# Altium PCB top_board_rev1.PcbDoc
Units mm, origin at the board's own origin, x right, y up, seen from the top; angles counter-clockwise.
Board outline 109 x 70 mm, 4 copper layers (Top Layer, +12V, -12V, Bottom Layer), stack 0.603 mm thick; 89 components, 70 nets, 332 pads, 60 vias.
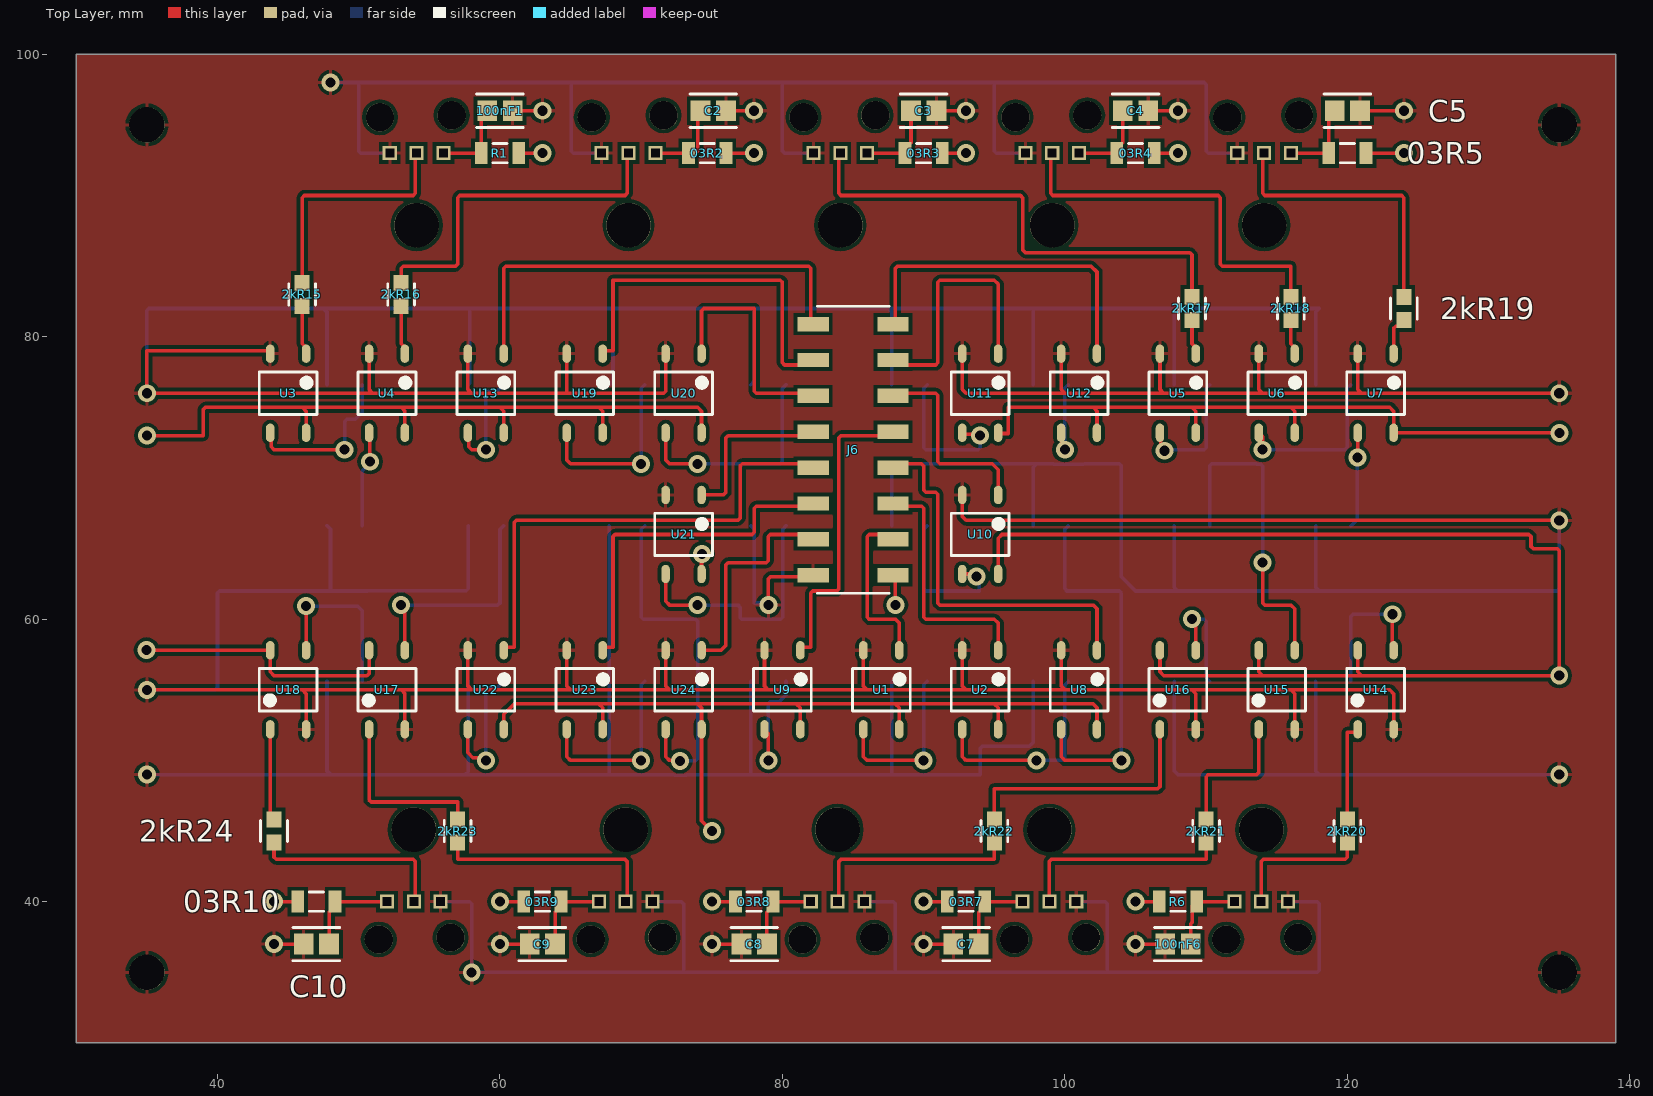
[diagram p0: Top Layer view]
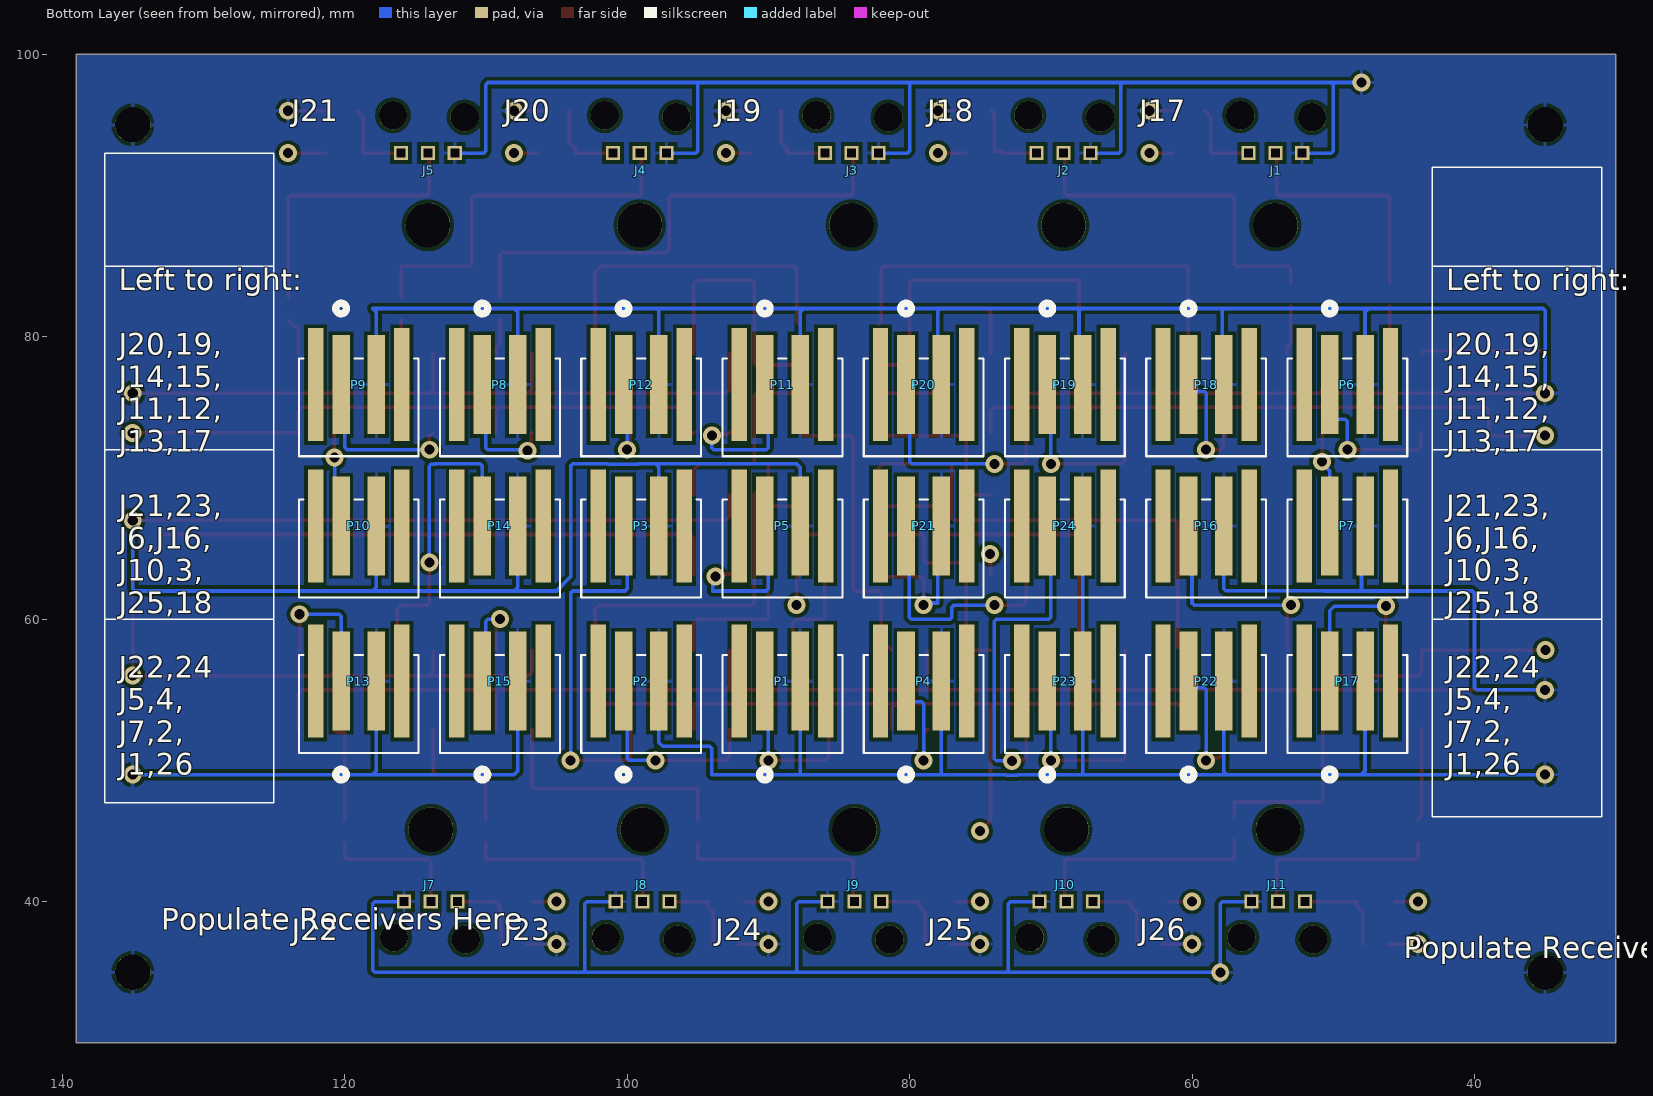
[diagram p1: Bottom Layer view, seen from below]
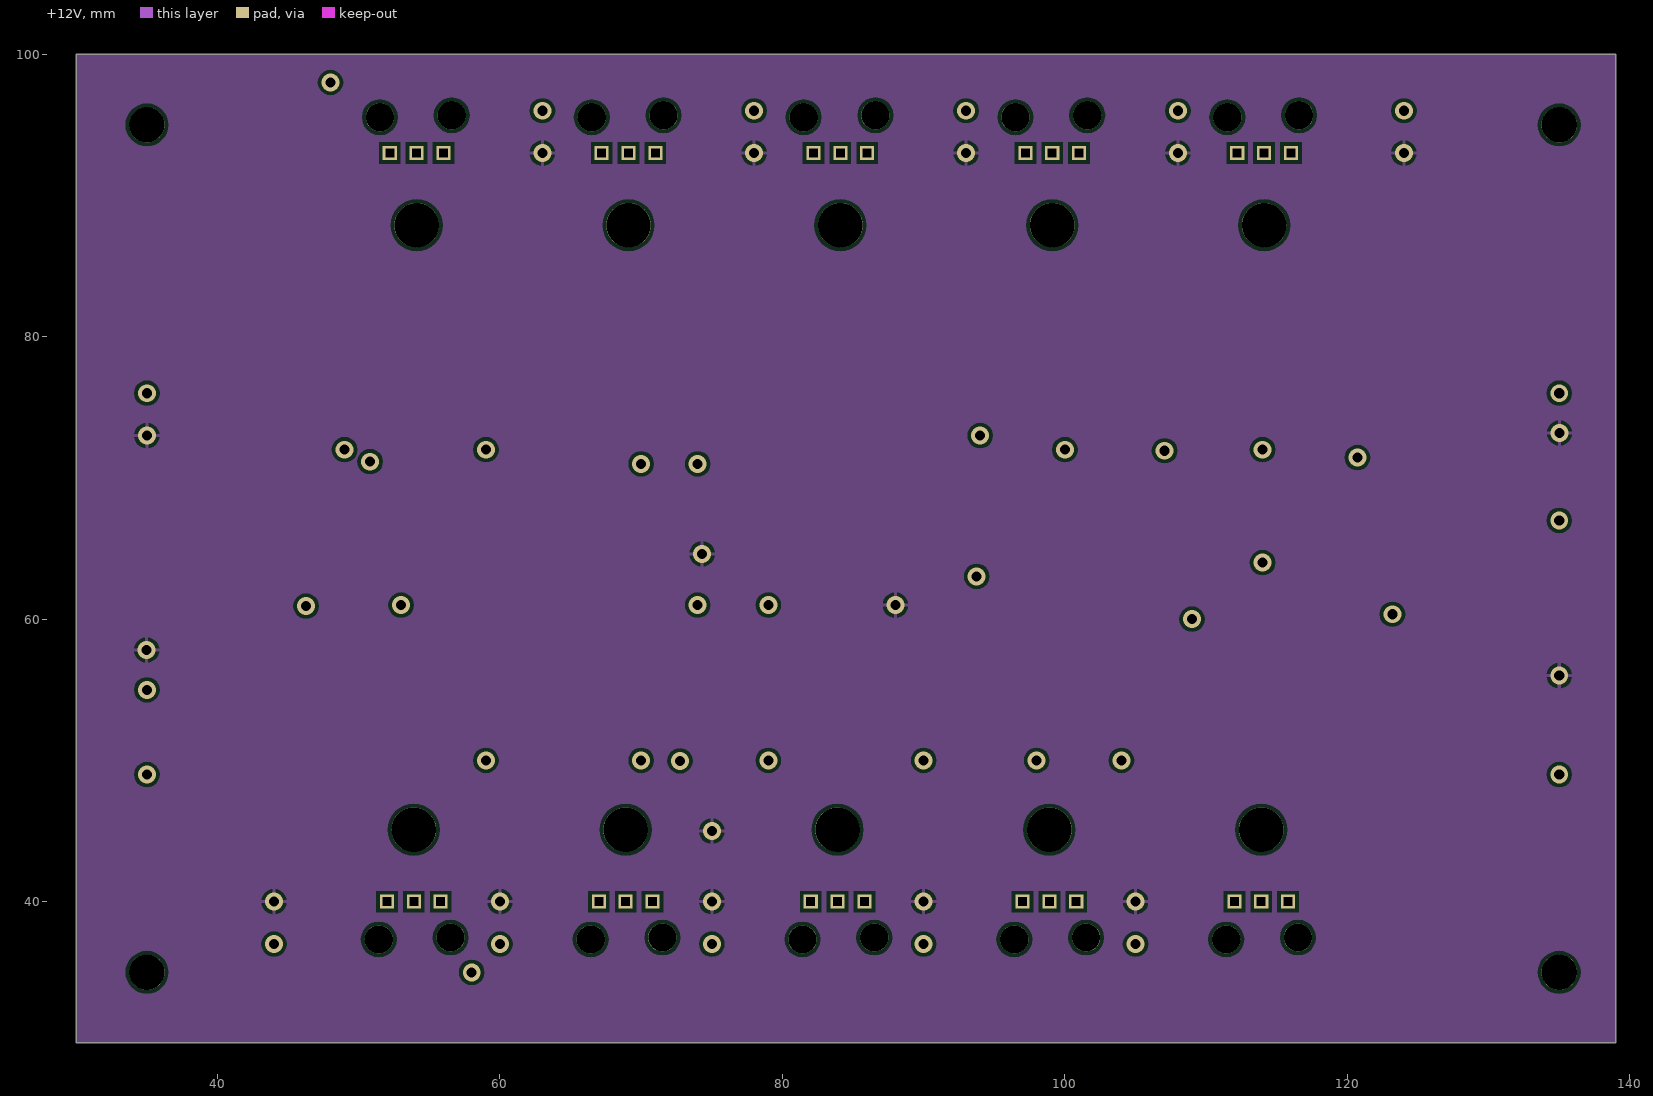
[diagram p2: +12V]
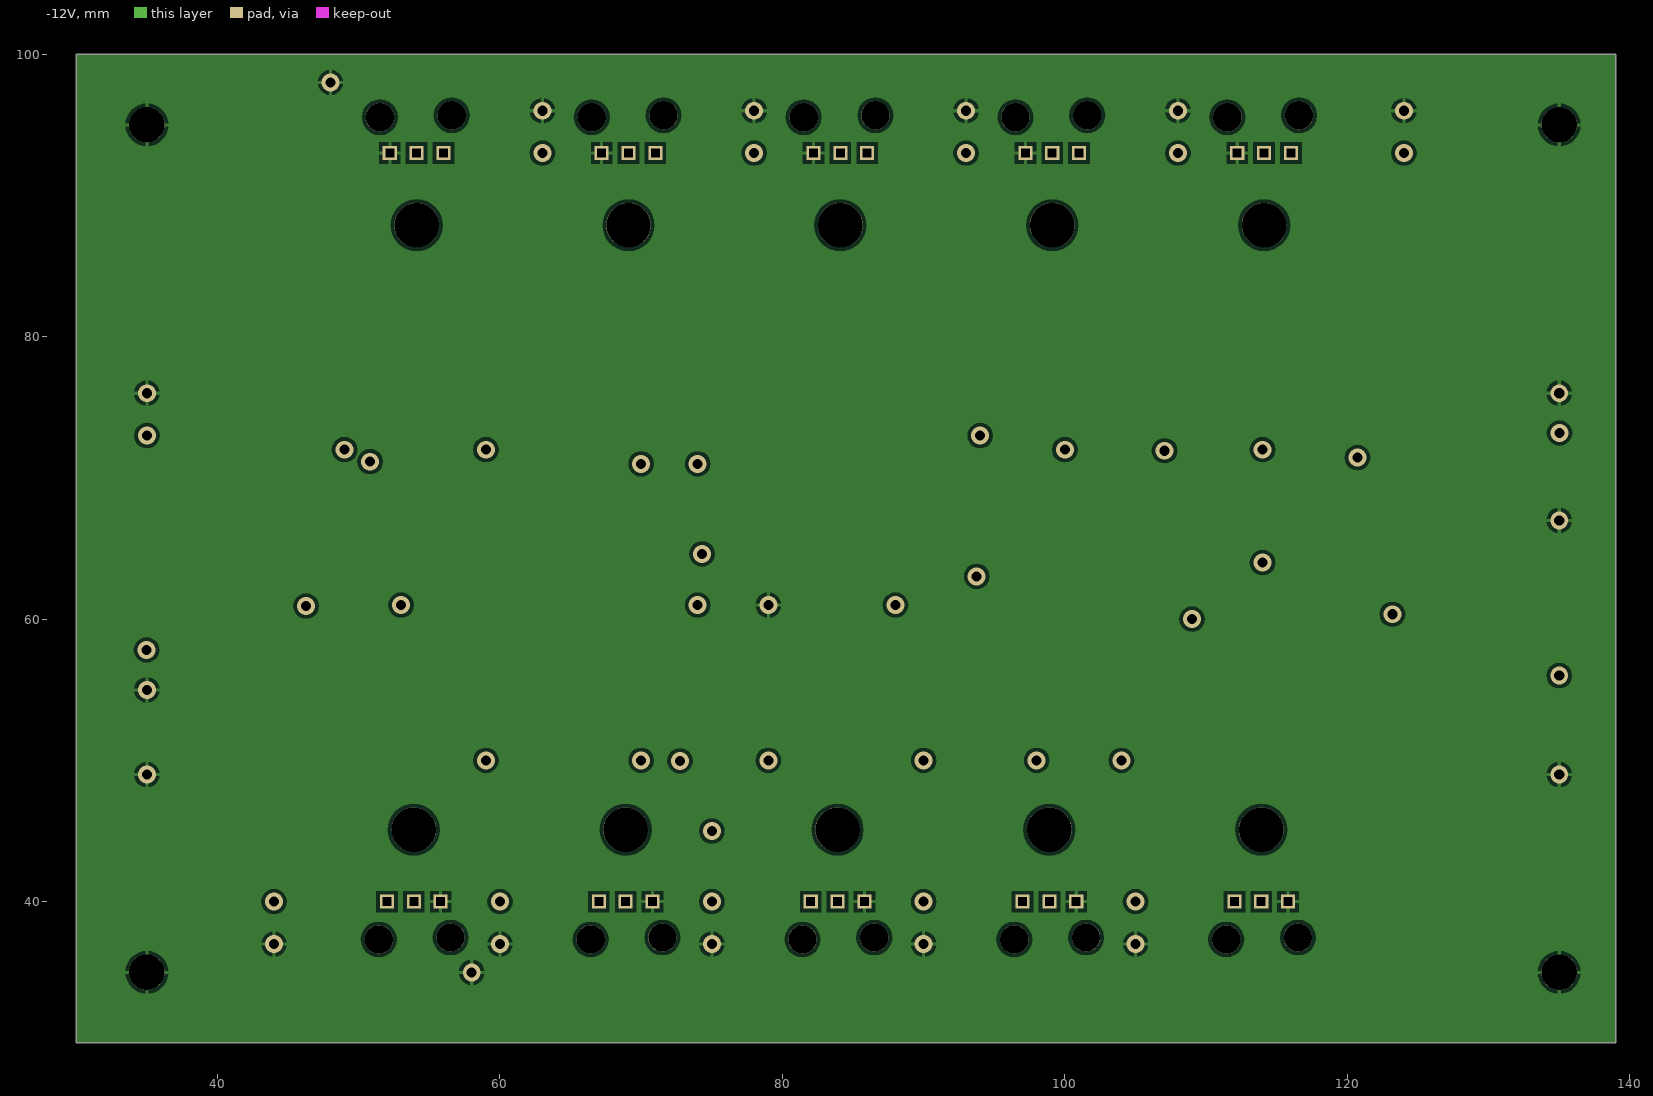
[diagram p3: -12V]
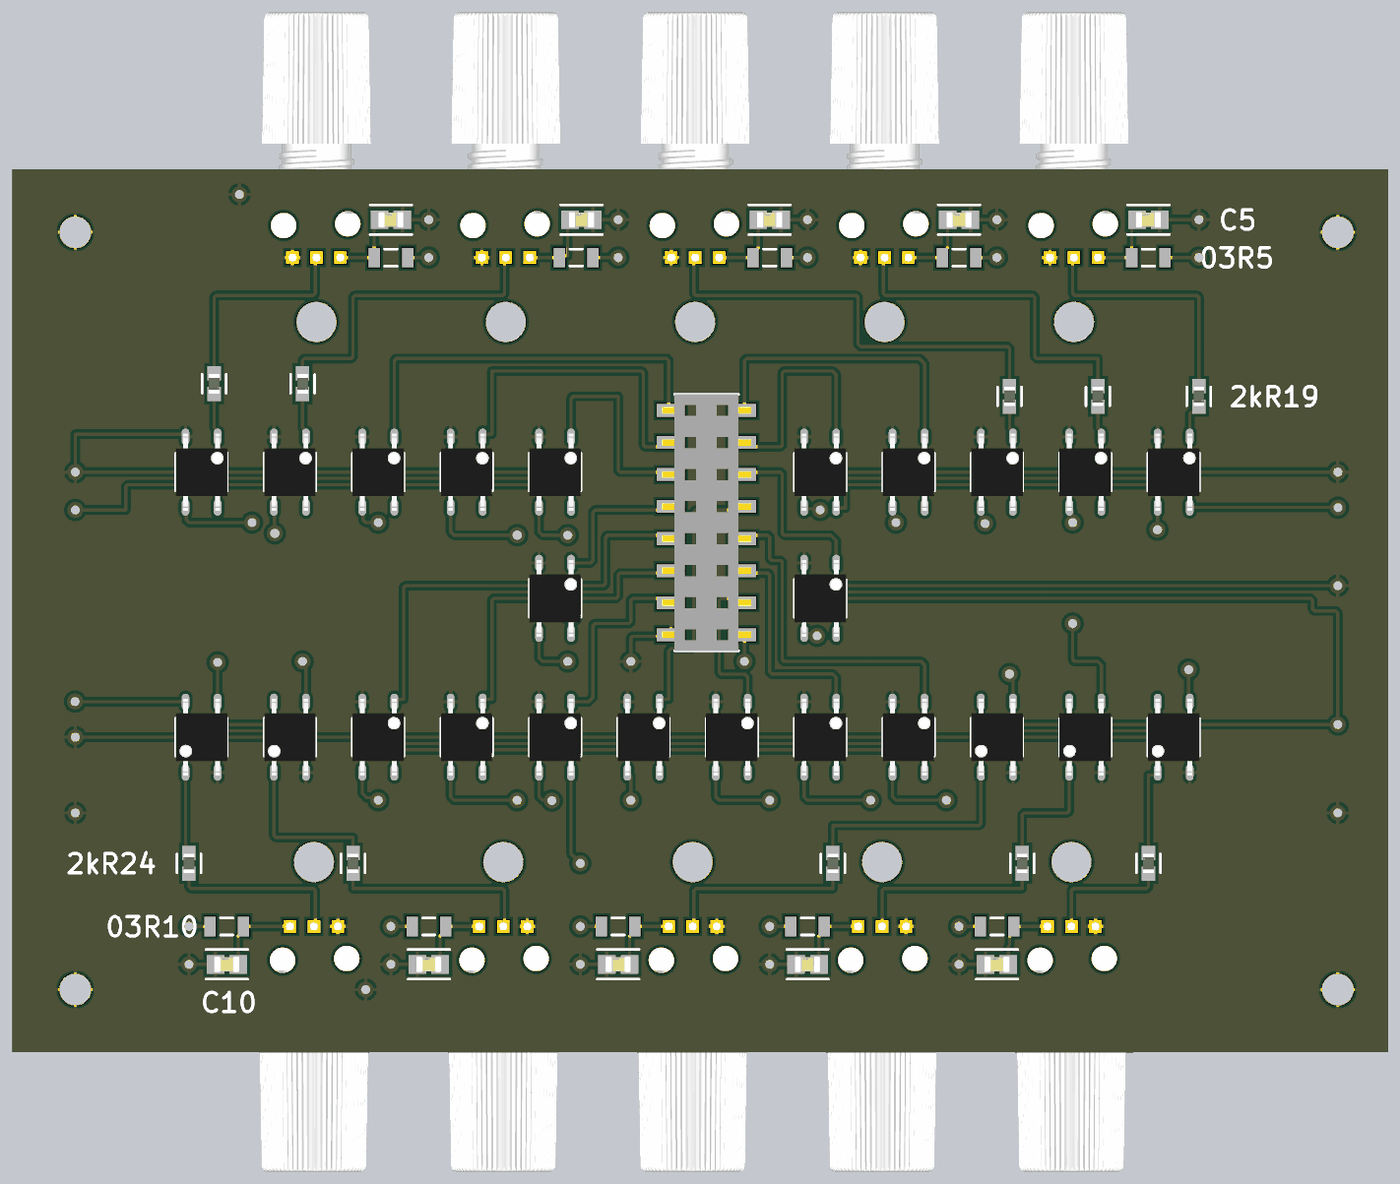
[diagram p4: 3D render of the assembled board from above, using the file's embedded part models]
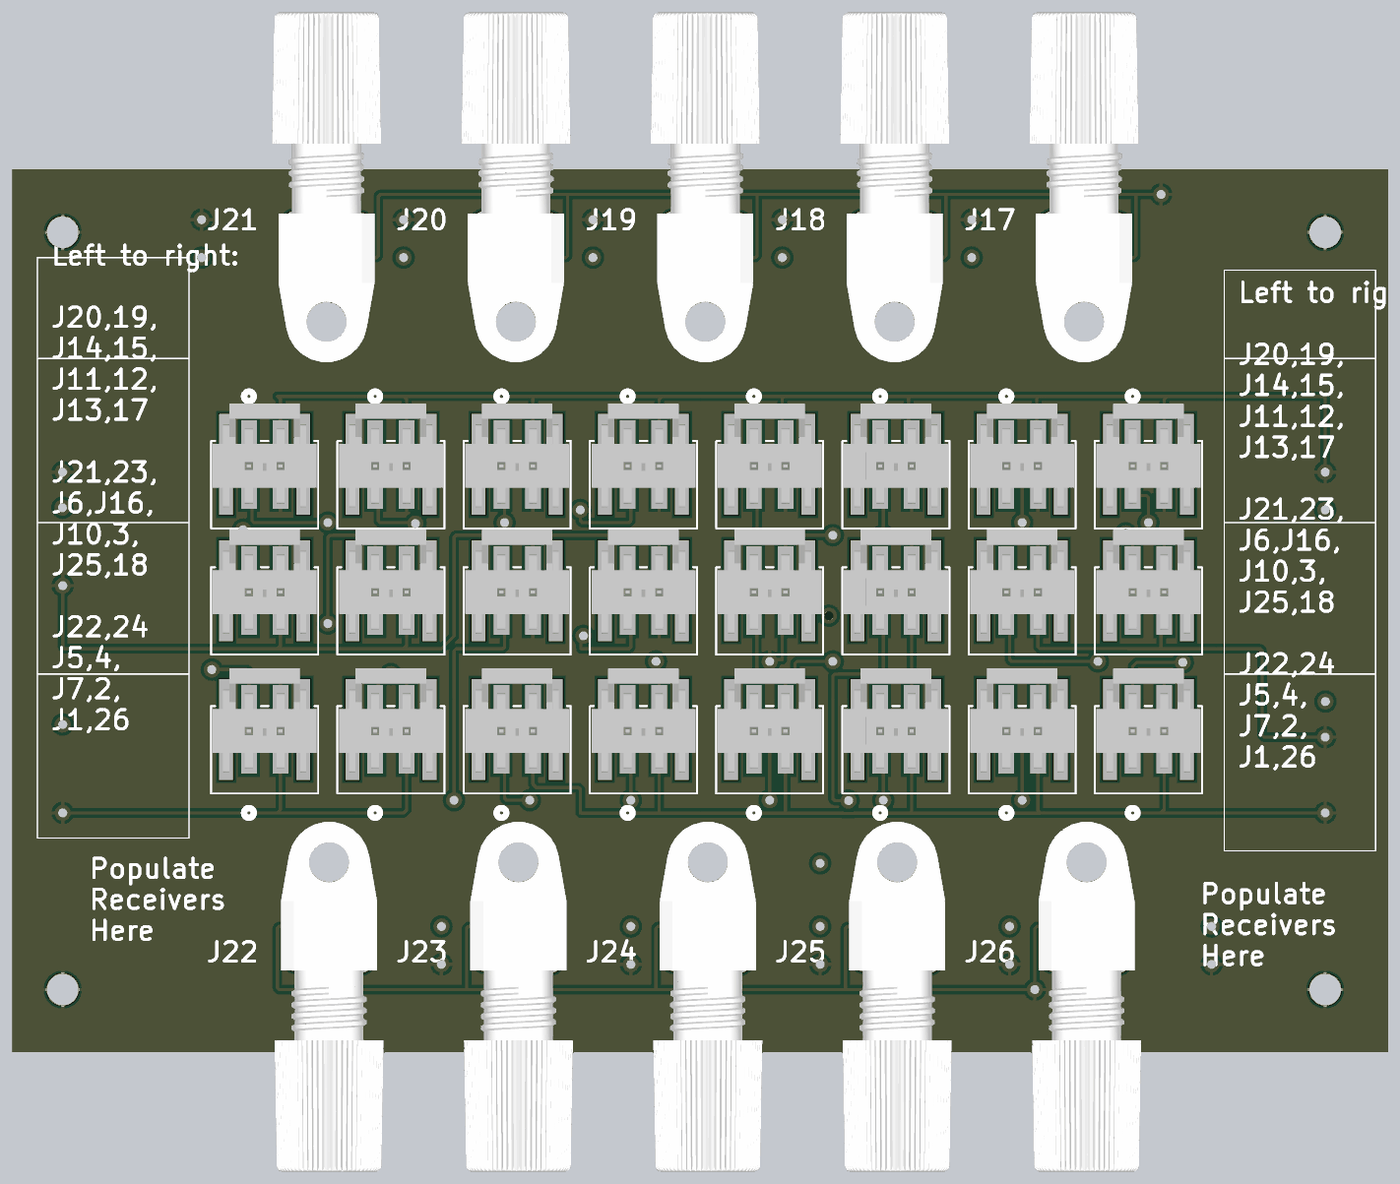
[diagram p5: 3D render of the assembled board from below, using the file's embedded part models]

## Layer stack, top to bottom
Top Solder: solder mask 0.0102, Solder Resist, Dk 3.5
Top Layer: signal copper 0.035
Dielectric 2: prepreg 0.0711, PP-006, Dk 4.1
+12V: signal copper 0.0356
Dielectric 1: dielectric 0.32, FR-4, Dk 4.8
-12V: signal copper 0.0356
Dielectric 3: prepreg 0.0711, PP-006, Dk 4.1
Bottom Layer: signal copper 0.035
Bottom Solder: solder mask 0.0102, Solder Resist, Dk 3.5

## Board outline
30,30 30,100 139,100 139,30

## Design rules (kind name [scope] priority, off if disabled: settings)
Clearance [All] p1: gap=0.254 ignorepadtopadclearanceinfootprint=FALSE except(0: Arc-Hole Track-Hole SMDPad-Hole THPad-Hole Via-Hole Fill-Hole Poly-Hole Region-Hole Text-Hole)
HoleSize [All] p1: absolutevalues=TRUE maxlimit=4 minlimit=0.025 maxpercent=80.000 minpercent=20.000
PolygonConnect [All] p1: connectstyle=Relief reliefconductorwidth=0.254 reliefentries=4 polygonreliefangle="90 Angle" airgapwidth=0.254
RoomDefinition top_schem_rev1 [InComponentClass('top_schem_rev1')] p1: confinementstyle=ConfineIn formatcopy=TRUE lockcomponents=FALSE outline 21,13 148,13 148,117 21,117
RoutingVias [All] p1: holewidth=0.711 width=1.27 viastyle="Through Hole" minholewidth=0.711 minwidth=1.27 maxholewidth=0.711 maxwidth=1.27
SolderMaskExpansion [All] p1: expansion=0.102 istentingtop=FALSE
Width [All] p1: maxlimit=0.254 minlimit=0.254 preferedwidth=0.254
29 further rules are at their usual default settings.

## Components (designator, comment, footprint, x,y, rotation, side; value= is the part's Value field where it differs from the comment)
2kR15 "CRCW06031K80FKEA" 2kOhm 46,83 r270 top
2kR16 "CRCW06031K80FKEA" 2kOhm 53,83 r270 top
2kR17 "CRCW06031K80FKEA" 2kOhm 109,82 r270 top
2kR18 "CRCW06031K80FKEA" 2kOhm 116,82 r270 top
2kR19 "CRCW06031K80FKEA" 2kOhm 124,82 r270 top
2kR20 "CRCW06031K80FKEA" 2kOhm 120,45 r90 top
2kR21 "CRCW06031K80FKEA" 2kOhm 110,45 r90 top
2kR22 "CRCW06031K80FKEA" 2kOhm 95,45 r90 top
2kR23 "CRCW06031K80FKEA" 2kOhm 57,45 r90 top
2kR24 "CRCW06031K80FKEA" 2kOhm 44,45 r90 top
03R2 "ERJ-2BQJR30X" "03 Ohm" 74.675,93 r180 top
03R3 "ERJ-2BQJR30X" "03 Ohm" 90,93 r180 top
03R4 "ERJ-2BQJR30X" "03 Ohm" 105,93 r180 top
03R5 "ERJ-2BQJR30X" "03 Ohm" 120,93 r180 top
03R7 "ERJ-2BQJR30X" "03 Ohm" 93,40 r180 top
03R8 "ERJ-2BQJR30X" "03 Ohm" 78,40 r180 top
03R9 "ERJ-2BQJR30X" "03 Ohm" 63,40 r180 top
03R10 "ERJ-2BQJR30X" "03 Ohm" 47,40 r180 top
100nF1 "C0805C104K5RACTU" 100nF 60,96 r0 top (schematic designator C1)
100nF6 "C0805C104K5RACTU" 100nF 108,37 r0 top (schematic designator C6)
C2 "C0805C104K5RACTU" 100nF 75.099,96 r0 top
C3 "C0805C104K5RACTU" 100nF 90,96 r0 top
C4 "C0805C104K5RACTU" 100nF 105,96 r0 top
C5 "C0805C104K5RACTU" 100nF 120,96 r0 top
C7 "C0805C104K5RACTU" 100nF 93,37 r0 top
C8 "C0805C104K5RACTU" 100nF 78,37 r0 top
C9 "C0805C104K5RACTU" 100nF 63,37 r0 top
C10 "C0805C104K5RACTU" 100nF 47,37 r0 top
J1 "IF-D95T" IF-D95 56,93 r180 bottom
J2 "IF-D95T" IF-D95 71,93 r180 bottom
J3 "IF-D95T" IF-D95 86,93 r180 bottom
J4 "IF-D95T" IF-D95 101,93 r180 bottom
J5 "IF-D95T" IF-D95 116,93 r180 bottom
J6 "SSM-108-X-DV" "16 pin header" 85,72 r270 top
J7 "IF-D95T" IF-D95 112,40 r0 bottom
J8 "IF-D95T" IF-D95 97,40 r0 bottom
J9 "IF-D95T" IF-D95 82,40 r0 bottom
J10 "IF-D95T" IF-D95 67,40 r0 bottom
J11 "IF-D95T" IF-D95 52,40 r0 bottom
P1 "1054311102" CONN_1054311102_MOL 89,54 r0 bottom
P2 "1054311102" CONN_1054311102_MOL 99,54 r0 bottom
P3 "1054311102" CONN_1054311102_MOL 99,65 r0 bottom
P4 "1054311102" CONN_1054311102_MOL 79,54 r0 bottom
P5 "1054311102" CONN_1054311102_MOL 89,65 r0 bottom
P6 "1054311102" CONN_1054311102_MOL 49,75 r0 bottom
P7 "1054311102" CONN_1054311102_MOL 49,65 r0 bottom
P8 "1054311102" CONN_1054311102_MOL 109,75 r0 bottom
P9 "1054311102" CONN_1054311102_MOL 119,75 r0 bottom
P10 "1054311102" CONN_1054311102_MOL 119,65 r0 bottom
P11 "1054311102" CONN_1054311102_MOL 89,75 r0 bottom
P12 "1054311102" CONN_1054311102_MOL 99,75 r0 bottom
P13 "1054311102" CONN_1054311102_MOL 119,54 r0 bottom
P14 "1054311102" CONN_1054311102_MOL 109,65 r0 bottom
P15 "1054311102" CONN_1054311102_MOL 109,54 r0 bottom
P16 "1054311102" CONN_1054311102_MOL 59,65 r0 bottom
P17 "1054311102" CONN_1054311102_MOL 49,54 r0 bottom
P18 "1054311102" CONN_1054311102_MOL 59,75 r0 bottom
P19 "1054311102" CONN_1054311102_MOL 69,75 r0 bottom
P20 "1054311102" CONN_1054311102_MOL 79,75 r0 bottom
P21 "1054311102" CONN_1054311102_MOL 79,65 r0 bottom
P22 "1054311102" CONN_1054311102_MOL 59,54 r0 bottom
P23 "1054311102" CONN_1054311102_MOL 69,54 r0 bottom
P24 "1054311102" CONN_1054311102_MOL 69,65 r0 bottom
R1 "ERJ-2BQJR30X" "03 Ohm" 60,93 r180 top
R6 "ERJ-2BQJR30X" "03 Ohm" 108,40 r180 top
U1 "Solid state relay" CPC1002N 87,55 r270 top
U2 "Solid state relay" CPC1002N 94,55 r270 top
U3 "Solid state relay" CPC1002N 45,76 r270 top
U4 "Solid state relay" CPC1002N 52,76 r270 top
U5 "Solid state relay" CPC1002N 108,76 r270 top
U6 "Solid state relay" CPC1002N 115,76 r270 top
U7 "Solid state relay" CPC1002N 122,76 r270 top
U8 "Solid state relay" CPC1002N 101,55 r270 top
U9 "Solid state relay" CPC1002N 80,55 r270 top
U10 "Solid state relay" CPC1002N 94,66 r270 top
U11 "Solid state relay" CPC1002N 94,76 r270 top
U12 "Solid state relay" CPC1002N 101,76 r270 top
U13 "Solid state relay" CPC1002N 59,76 r270 top
U14 "Solid state relay" CPC1002N 122,55 r90 top
U15 "Solid state relay" CPC1002N 115,55 r90 top
U16 "Solid state relay" CPC1002N 108,55 r90 top
U17 "Solid state relay" CPC1002N 52,55 r90 top
U18 "Solid state relay" CPC1002N 45,55 r90 top
U19 "Solid state relay" CPC1002N 66,76 r270 top
U20 "Solid state relay" CPC1002N 73,76 r270 top
U21 "Solid state relay" CPC1002N 73,66 r270 top
U22 "Solid state relay" CPC1002N 59,55 r270 top
U23 "Solid state relay" CPC1002N 66,55 r270 top
U24 "Solid state relay" CPC1002N 73,55 r270 top

## Footprints (in the part's own frame and the unit in brackets; to place one, negate y for a bottom-side part, rotate by r counter-clockwise, add the part's x,y. Pads: shape width x height; smd on the part's side, far side on the other; paste and mask are expansions set on the pad)
2kOhm [mm]
  rect 1.135x1.062 smd paste+0 mask+0: 1(-0.815,0) 2(0.815,0)
  silkscreen extent -0.75,-0.95 0.75,0.95, body extent -1.88,-1.03 1.88,1.03, height 0.25
"03 Ohm" [mm]
  rect 0.9x1.55 smd: 1(-1.325,0) 2(1.325,0)
  silkscreen extent -0.5,-0.67 0.5,0.67, body extent -1.63,-0.82 1.62,0.82, height 0.7
"16 pin header" [mm]
  rect 1.02x2.22 smd: 01(8.89,-2.825) 02(8.89,2.825) 03(6.35,-2.825) 04(6.35,2.825) 05(3.81,-2.825) 06(3.81,2.825) 07(1.27,-2.825) 08(1.27,2.825) 09(-1.27,-2.825) 10(-1.27,2.825) 11(-3.81,-2.825) 12(-3.81,2.825) 13(-6.35,-2.825) 14(-6.35,2.825) 15(-8.89,-2.825) 16(-8.89,2.825)
  silkscreen extent -10.16,-2.54 10.16,2.54, body extent -10.16,-3.52 10.16,3.52, height 7.43
100nF [mil]
  rect 55x58 smd paste+0 mask+0: 1(-35.46,0) 2(35.46,0)
  silkscreen extent -65,-46 65,46, body extent -85,-50 85,50, height 10
CONN_1054311102_MOL [mil]
  rect 49x276 smd paste+0 mask+0: 1(49.21,-63.38) 2(-49.21,-63.38)
  rect 43x315 smd: 3(-120.28,-63.38) 4(120.28,-63.38)
  silkscreen extent -167,-136 167,212, body extent -162,-254 162,71, height 440
CPC1002N [mm] "Solid-State Relay"
  oval 1.3x0.6 smd paste+0 mask+0: 1(-2.8,1.27) 2(-2.8,-1.27) 3(2.8,-1.27) 4(2.8,1.27)
  silkscreen extent -1.5,-2.04 1.5,2.04, body extent -3.55,-2.25 3.55,2.25, height 0.25
IF-D95 [mm]
  rect 1x1 hole 0.6 square: 1(0,0) 2(1.9,0) 3(3.8,0)
  round 2 hole 2: 4(-0.58,2.675) 4(4.5,2.54)
  round 3.15 hole 3.15: 4(1.9,-5.1)
  body extent -2.42,-8.3 6.22,19.44, height 11.3

## Part data
2kR15 2kR16 2kR17 2kR18 2kR19 2kR20 2kR21 2kR22 2kR23 2kR24: "Res Thick Film 0603 1.8K Ohm 1% 1/10W ±100ppm/°C Molded SMD Paper T/R", Case Code (Imperial)=0603, Case Code (Metric)=1608, Manufacturer=Vishay, Max Operating Temperature=155°C, Max Power Dissipation=100mW, Min Operating Temperature=-55°C, Package Quantity=5000, Resistance=1.8kR, Resistance Tolerance=1%, Resistor Type="Thick Film", Temperature Coefficient=100ppm/°C, Voltage Rating=75V, Case/Package=0603, Category="Chip SMD Resistors", ComponentLink1Description=https://datasheet.ciiva.com/11809/0900766b80d98afc-11809198.pdf?src-supplier=RSComponents, ComponentLink1URL=https://datasheet.ciiva.com/11809/0900766b80d98afc-11809198.pdf?src-supplier=RSComponents, ComponentLink2Description=https://datasheet.ciiva.com/2559/dcrcwe3-2559458.pdf?src-supplier=Digi-Key, ComponentLink2URL=https://datasheet.ciiva.com/2559/dcrcwe3-2559458.pdf?src-supplier=Digi-Key, ComponentLink3Description=https://datasheet.ciiva.com/2559/dcrcwe3-2559459.pdf?src-supplier=Digi-Key, ComponentLink3URL=https://datasheet.ciiva.com/2559/dcrcwe3-2559459.pdf?src-supplier=Digi-Key, ComponentLink4Description=https://datasheet.ciiva.com/2559/dcrcwe3-2559460.pdf?src-supplier=Digi-Key, ComponentLink4URL=https://datasheet.ciiva.com/2559/dcrcwe3-2559460.pdf?src-supplier=Digi-Key, ComponentLink5Description=https://datasheet.ciiva.com/3257/dcrcwe3-3257191.pdf?src-supplier=Avnet, ComponentLink5URL=https://datasheet.ciiva.com/3257/dcrcwe3-3257191.pdf?src-supplier=Avnet, ComponentLink6Description=https://datasheet.ciiva.com/5547/dcrcwe3-109170-5547689.pdf?src-supplier=Mouser, ComponentLink6URL=https://datasheet.ciiva.com/5547/dcrcwe3-109170-5547689.pdf?src-supplier=Mouser, ComponentLink7Description=https://datasheet.ciiva.com/26314/fld-crcw-e3-data-en-26314680.pdf?src-supplier=Distrelec, ComponentLink7URL=https://datasheet.ciiva.com/26314/fld-crcw-e3-data-en-26314680.pdf?src-supplier=Distrelec, ComponentLink8Description=https://datasheet.ciiva.com/22872/70201119-22872444.pdf?src-supplier=Allied+Electronics, ComponentLink8URL=https://datasheet.ciiva.com/22872/70201119-22872444.pdf?src-supplier=Allied+Electronics, ComponentLink9Description=https://datasheet.ciiva.com/7673/1533075-7673143.pdf?src-supplier=Element14, ComponentLink9URL=https://datasheet.ciiva.com/7673/1533075-7673143.pdf?src-supplier=Element14, Construction=Rectangular, Contact Plating=Tin, Depth=0.85mm, Features="Automotive AEC-Q200", Height=0.45mm, Lead Free="Lead Free", Length=1.55mm, Manufacturer Part Number=CRCW06031K80FKEA, Military Standard=Not, Number of Terminations=2, Packaging="Tape and Reel", Power Rating=100mW, Pricing 1="50=0.06500, 500=0.06000, 1000=0.05600, 2000=0.05200, 4000=0.04800 (USD)", Radiation Hardening=No, REACH SVHC=Unknown, RoHS=Yes, RoHS Compliant=Yes, Series=CRCW, Size Code=0603, Stock 1=7900, Supplier 1=RSComponents, Technology="THICK FILM", Termination=SMD/SMT, Tolerance=1%, Voltage Rating (DC)=75V, Weight=7.1E-05oz, Width=0.033inch
03R2 03R3 03R4 03R5 03R7 03R8 03R9 03R10 R1 R6: "RES 0.3 OHM 5% 1/6W 0402", Case Code (Imperial)=0402, Case Code (Metric)=1005, Manufacturer=Panasonic, Max Operating Temperature=125°C, Max Power Dissipation=167mW, Min Operating Temperature=-55°C, Resistance=300mR, Resistor Type="Thick Film", Supplier Part Number 1=P17347CT-ND, Temperature Coefficient=250ppm/°C, Tolerance=5%, Case/Package=0402, Category="Chip SMD Resistors", ComponentLink1Description=http://www.mouser.com/ds/2/315/AOA0000C295-1109214.pdf?src-supplier=Mouser, ComponentLink1URL=http://www.mouser.com/ds/2/315/AOA0000C295-1109214.pdf?src-supplier=Mouser, ComponentLink2Description=https://industrial.panasonic.com/cdbs/www-data/pdf/RDN0000/AOA0000C313.pdf?src-supplier=Digi-Key, ComponentLink2URL=https://industrial.panasonic.com/cdbs/www-data/pdf/RDN0000/AOA0000C313.pdf?src-supplier=Digi-Key, Features="Automotive AEC-Q200", Height=0.016inch, Length=0.039inch, Manufacturer Part Number=ERJ-2BQJR30X, Number of Terminations=2, Packaging="Tape and Reel", Pricing 1="1=0.21000, 10=0.17600, 25=0.12800, 50=0.09280, 100=0.06880, 250=0.05280, 500=0.04160, 1000=0.02880, 5000=0.02400 (USD)", RoHS=Yes, Stock 1=18282, Supplier 1=Digi-Key, Width=0.02inch
100nF1 100nF6 C2 C3 C4 C5 C7 C8 C9 C10: "Cap Ceramic 0.1uF 50V X7R 10% SMD 2.0 x 1.2 mm 125 C Paper T/R", Capacitance=100nF, Case Code (Imperial)=0805, Case Code (Metric)=2012, Dielectric=X7R, Dielectric Material=Ceramic, Manufacturer=KEMET, Max Operating Temperature=125°C, Min Operating Temperature=-55°C, Package Quantity=4000, Supplier Part Number 1=399-1170-1-ND, Tolerance=10%, Voltage=500V, Voltage Rating=50V, Case/Package=0805, Category="Ceramic Capacitors", ComponentLink1Description=https://datasheet.ciiva.com/28682/1851736-28682232.pdf?src-supplier=Element14, ComponentLink1URL=https://datasheet.ciiva.com/28682/1851736-28682232.pdf?src-supplier=Element14, ComponentLink2Description=https://datasheet.ciiva.com/14589/70095383-14589048.pdf?src-supplier=Allied+Electronics, ComponentLink2URL=https://datasheet.ciiva.com/14589/70095383-14589048.pdf?src-supplier=Allied+Electronics, ComponentLink3Description=https://datasheet.ciiva.com/32431/slceramic-chip-condensers-e-32431755.pdf?src-supplier=Distrelec, ComponentLink3URL=https://datasheet.ciiva.com/32431/slceramic-chip-condensers-e-32431755.pdf?src-supplier=Distrelec, ComponentLink4Description=https://datasheet.ciiva.com/18410/70095383-18410815.pdf?src-supplier=Allied+Electronics, ComponentLink4URL=https://datasheet.ciiva.com/18410/70095383-18410815.pdf?src-supplier=Allied+Electronics, Construction=Flat, Contact Plating=Tin,Matte, Depth=1.25mm, Height=0.9mm, Lead Pitch=0.75mm, Length=2mm, Manufacturer Part Number=C0805C104K5RACTU, Mount="Surface Mount,PCB", Number of Pins=2, Packaging="Tape and Reel", Pricing 1="1=0.15000, 10=0.11000, 50=0.06220, 100=0.05150, 500=0.03612, 1000=0.02991 (USD)", Radiation Hardening=No, REACH SVHC="No SVHC", RoHS=Yes, RoHS Compliant=Yes, Series=C0805C, Stock 1=2447786, Supplier 1=Digi-Key, Termination=SMD/SMT, Thickness=0.035inch, Voltage Rating (DC)=50V, Width=1.2mm
J1 J2 J3 J4 J5 J7 J8 J9 J10 J11: "DETECTOR PHOTOLOGIC TTL/CMOS", Manufacturer="Industrial Fiber Optics", Operating Supply Current=6mA, Package Quantity=50, Supplier Part Number 1=FB123-ND, Category="Fiber Optic Cables", ComponentLink1Description=https://datasheet.ciiva.com/2106/ifd95-2106550.pdf?src-supplier=Digi-Key, ComponentLink1URL=https://datasheet.ciiva.com/2106/ifd95-2106550.pdf?src-supplier=Digi-Key, Data Rate=125Kbps, Lead Free="Contains Lead", Manufacturer Part Number=IF-D95T, Rise Time=70ns, RoHS=No, Supplier 1=Digi-Key
P1 P2 P3 P4 P5 P6 P7 P8 P9 P10 P11 P12 P13 P14 P15 P16 P17 P18 P19 P20 P21 P22 P23 P24: "Nano-Fit Vertical Header, Surface Mount, 2.50mm Pitch, Single Row, 2 Circuits, 0.76 u00B5m Tin (Sn) Plating, Black,...", Manufacturer=Molex, Supplier Part Number 1=WM26073CT-ND, Category=Connectors, Manufacturer Part Number=1054311102, Pricing 1="1=2.05000, 10=1.85700, 100=1.59160 (USD)", RoHS=No, Stock 1=1192, Supplier 1=Digi-Key
U1 U2 U3 U4 U5 U6 U7 U8 U9 U10 U11 U12 U13 U14 U15 U16 U17 U18 U19 U20 U21 U22 U23 U24: library part CPC1002N
J6: System=Connector

## Free pads (board coordinates)
  round 2.5 hole 2.5: 1(35,35) 1(35,95) 1(135,35) 1(135,95)

## Via types
v1: diameter 1.27, hole 0.711, Top Layer to Bottom Layer, tented both sides, 60 vias

## Nets (pads, with @x,y where several pads share a name; then routed paths per layer and width w, separated by ;. In a path a pad name is that pad's centre, name@x,y a point inside that pad or via, vN(x,y) a via of type N, cw(c..) or ccw(c..) an arc to the next point about the centre after c; other vN are vias at no path point)
+12V: 03R2.1 03R3.1 03R4.1 03R5.1 03R7.2 03R8.2 03R9.2 03R10.2 J6.02 R1.1 R6.2 U1.4 U2.4 U3.4 U4.4 U5.4 U6.4 U7.4 U8.4 U9.4 U10.4 U11.4 U12.4 U13.4 U14.4 U15.4 U16.4 U17.4 U18.4 U19.4 U20.4 U21.4 U22.4 U23.4 U24.4 | length 288.2
  Top Layer w0.254: v1(34.983,57.821) 35.004,57.8 U18.4 43.73,56.27 44,56 50.581,56 50.73,56.149 U17.4 ; v1(35,73) 39,73 39,74.851 39.149,75 46,75 ; v1(44,40) 03R10.2 ; U3.4 46.27,74.73 46,75 ; U4.4 53.27,74.73 53,75 ; v1(60,40) 03R9.2 ; U22.4 60.27,53.27 61,54 67,54 ; U13.4 60.27,74.73 60,75 ; R1.1 v1(63,93) ; U23.4 67.27,53.73 67,54 ; U19.4 67.27,74.73 67,75 ; U21.4 74.27,64.581 v1(74.312,64.623) ; U20.4 74.27,74.73 74,75 67,75 ; v1(75,40) 03R8.2 ; v1(75,45) 74.27,45.73 74.27,53.73 74,54 ; 03R2.1 v1(78,93) ; U9.4 81.27,53.73 81,54 ; J6.02 88,62.935 v1(88,61) ; U1.4 88.27,53.73 88,54 ; v1(90,40) 03R7.2 ; 03R3.1 v1(93,93) ; U2.4 95.27,53.73 95,54 ; U10.4 95.27,65.73 95.54,66 132.851,66 133,65.851 133,65.149 133.149,65 134.851,65 135,64.851 v1(135,56) 121,56 ; U11.4 95.321,73.149 96,73.149 96,75 102,75 ; U8.4 102.27,53.73 102,54 95,54 ; U12.4 102.27,74.73 102,75 ; v1(105,40) R6.2 ; 03R4.1 v1(108,93) ; U16.4 106.73,56.27 107,56 114,56 ; U5.4 109.27,74.73 109,75 ; U15.4 113.73,56.27 114,56 ; U6.4 116.27,74.73 116,75 ; U14.4 120.73,56.27 121,56 ; 03R5.1 v1(124,93) ; v1(135.016,73.182) 134.998,73.2 U7.4 123.27,74.73 123,75 116,75 ; 46,75 53,75 ; 53,75 60,75 ; 60,75 67,75 ; 67,54 74,54 ; 74,54 81,54 ; 81,54 88,54 ; 88,54 95,54 ; 102,75 109,75 ; 109,75 116,75 ; 114,56 121,56
+12V1: 100nF1.1 J1.1 R1.2 | length 5.9
  Top Layer w0.254: J1.1 R1.2 58.675,95.576 100nF1.1
+12V2: 03R2.2 C2.1 J2.1 | length 6
  Top Layer w0.254: J2.1 03R2.2 73.499,93.149 74,93.149 74,95.802 C2.1
+12V3: 03R3.2 C3.1 J3.1 | length 5.9
  Top Layer w0.254: J3.1 03R3.2 88.675,93.325 89.099,93.749 C3.1
+12V4: 03R4.2 C4.1 J4.1 | length 5.9
  Top Layer w0.254: J4.1 03R4.2 103.675,93.325 104.099,93.749 C4.1
+12V5: 03R5.2 C5.1 J5.1 | length 5.9
  Top Layer w0.254: J5.1 03R5.2 118.675,95.576 C5.1
+12V6: 100nF6.2 J7.1 R6.1 | length 5.9
  Top Layer w0.254: 100nF6.2 108.901,38.43 109.002,38.531 109.002,39.677 R6.1 J7.1
+12V7: 03R7.1 C7.2 J8.1 | length 5.9
  Top Layer w0.254: C7.2 93.901,39.251 94.325,39.675 03R7.1 J8.1
+12V8: 03R8.1 C8.2 J9.1 | length 5.9
  Top Layer w0.254: C8.2 78.901,39.251 79.325,39.675 03R8.1 J9.1
+12V9: 03R9.1 C9.2 J10.1 | length 5.9
  Top Layer w0.254: C9.2 63.901,39.251 64.325,39.675 03R9.1 J10.1
+12V10: 03R10.1 C10.2 J11.1 | length 6.9
  Top Layer w0.254: C10.2 47.901,39.251 48.325,39.675 03R10.1 J11.1
BIAS_1: P1.1 U1.3 | length 12
  Top Layer w0.254: U1.3 85.73,50.27 86,50 v1(90,50)
  Bottom Layer w0.254: v1(90,50) 90,55.36 P1.1
BIAS_2: P2.1 U2.3 | length 14.9
  Top Layer w0.254: U2.3 92.73,50.27 93,50 v1(98,50)
  Bottom Layer w0.254: v1(98,50) 99.851,50 100,50.149 100,55.36 P2.1
BIAS_3: P3.1 U8.3 | length 26.9
  Top Layer w0.254: U8.3 99.73,50.27 100,50 v1(104,50)
  Bottom Layer w0.254: P3.1 100,66.36 100,62.149 100.149,62 103.851,62 104,61.851 v1(104,50)
BIAS_4: P4.1 U9.3 | length 8.8
  Top Layer w0.254: U9.3 79,51.93 v1(79,50)
  Bottom Layer w0.254: v1(79,50) 79,54 79.149,54.149 79.755,54.149 80.25,54.644 P4.1
BIAS_5: P5.1 U10.3 | length 10.8
  Top Layer w0.254: U10.3 93.581,63.2 v1(93.753,63.028)
  Bottom Layer w0.254: P5.1 90,66.36 90,62.149 90.149,62 93.936,62 93.947,62.012 93.947,62.833 v1(93.753,63.028)
BIAS_6: P11.1 U11.3 | length 10.9
  Top Layer w0.254: U11.3 92.83,73.1 93.9,73.1 v1(94,73)
  Bottom Layer w0.254: P11.1 90,76.36 90,72.149 90.149,72 93.851,72 94,72.149 v1(94,73)
BIAS_7: P12.1 U12.3 | length 6
  Top Layer w0.254: U12.3 99.796,73.134 99.796,72.479 100,72.275 v1(100,72)
  Bottom Layer w0.254: v1(100,72) 100,76.36 P12.1
BIAS_8: P18.1 U13.3 | length 8.1
  Top Layer w0.254: U13.3@57.57,73 57.73,73.16 U13.3 57.796,73.134 57.796,72.204 58,72 v1(59,72)
  Bottom Layer w0.254: v1(59,72) 59,76 59.149,76.149 59.789,76.149 P18.1
BIAS_9: P19.1 U19.3 | length 13
  Top Layer w0.254: U19.3 64.73,71.27 65,71 69.996,71 v1(70,71.004)
  Bottom Layer w0.254: v1(70,71.004) 70,76.36 P19.1
BIAS_10: P20.1 U20.3 | length 15.9
  Top Layer w0.254: U20.3 71.73,71.27 72,71 v1(74,71)
  Bottom Layer w0.254: v1(74,71) 79.851,71 80,71.149 80,76.36 P20.1
BIAS_11: P21.1 U21.3 | length 17.8
  Top Layer w0.254: U21.3 71.73,61.27 72,61 v1(74,61)
  Bottom Layer w0.254: v1(74,61) 76.851,61 77,60.851 77,60.149 77.165,59.984 79.851,59.984 80.016,60.149 80.016,66.376 P21.1
BIAS_12: P22.1 U22.3 | length 9.7
  Top Layer w0.254: U22.3 57.73,50.545 58.081,50.194 58.806,50.194 v1(59,50)
  Bottom Layer w0.254: v1(59,50) 59,55 59.149,55.149 59.789,55.149 P22.1
BIAS_13: P23.1 U23.3 | length 13
  Top Layer w0.254: U23.3 64.73,50.27 65,50 v1(70,50)
  Bottom Layer w0.254: v1(70,50) 70,55.36 P23.1
BIAS_14: P24.1 U24.3 | length 24.8
  Top Layer w0.254: U24.3 71.73,50.27 72,50 72.723,50 v1(72.749,49.974)
  Bottom Layer w0.254: P24.1 70,66.36 70,60.149 70.149,60 73.563,60 73.579,59.984 73.867,59.984 74,59.851 74,50.123 73.851,49.974 v1(72.749,49.974)
BIAS_15: P6.1 U3.3 | length 11.8
  Top Layer w0.254: U3.3 43.796,73.134 43.796,72.204 44,72 v1(49,72)
  Bottom Layer w0.254: v1(49,72) 49,74 49.149,74.149 49.755,74.149 50.25,74.644 P6.1
BIAS_16: P7.1 U4.3 | length 6.8
  Top Layer w0.254: U4.3 50.767,73.163 50.767,71.187 v1(50.803,71.151)
  Bottom Layer w0.254: P7.1 50.25,70.496 50.803,71.049 v1(50.803,71.151)
BIAS_17: P8.1 U5.3 | length 9
  Top Layer w0.254: U5.3 106.796,73.134 106.796,72.467 107.061,72.202 v1(107.061,71.927)
  Bottom Layer w0.254: v1(107.061,71.927) 107.134,72 109.851,72 110,72.149 110,76.36 P8.1
BIAS_18: P9.1 U6.3 | length 11.9
  Top Layer w0.254: U6.3 114,72.93 v1(114,72)
  Bottom Layer w0.254: v1(114,72) 119.835,72 120,72.165 120,76.36 P9.1
BIAS_19: P10.1 U7.3 | length 6.8
  Top Layer w0.254: v1(120.711,71.439) 120.72,71.448 120.72,73.19 U7.3
  Bottom Layer w0.254: P10.1 120.711,67.071 v1(120.711,71.439)
BIAS_20: P13.1 U14.3 | length 10.2
  Top Layer w0.254: v1(123.188,60.351) 123.188,57.882 U14.3
  Bottom Layer w0.254: P13.1 120.25,60.202 120.399,60.351 v1(123.188,60.351)
BIAS_21: P14.1 U15.3 | length 23.2
  Top Layer w0.254: v1(114,64) 114,61.149 114.149,61 116,61 116.27,60.73 U15.3
  Bottom Layer w0.254: P14.1 110.25,70.851 110.399,71 113.563,71 113.579,70.984 113.851,70.984 114,70.835 v1(114,64)
BIAS_22: P15.1 U16.3 | length 7.7
  Top Layer w0.254: v1(109,60) 109,59.725 109.27,59.455 U16.3
  Bottom Layer w0.254: v1(109,60) 109.851,60 110,59.851 110,55.86 P15.1
BIAS_23: P16.1 U17.3 | length 15.9
  Top Layer w0.254: v1(53,61) 53,60.725 53.27,60.455 U17.3
  Bottom Layer w0.254: v1(53,61) 59.851,61 60,61.149 60,66.36 P16.1
BIAS_24: P17.1 U18.3 | length 12.2
  Top Layer w0.254: U18.3 46.27,60.918 v1(46.276,60.924)
  Bottom Layer w0.254: v1(46.276,60.924) 49.924,60.924 50.25,60.598 P17.1
DIG_1: J6.04 U1.1 | length 12.1
  Top Layer w0.254: J6.04 87.475,66 86.149,66 86,65.851 86,60.149 86.165,59.984 88.016,59.984 88.27,59.73 U1.1
DIG_2: J6.06 U2.1 | length 17.4
  Top Layer w0.254: J6.06 88.015,68 89.851,68 90,67.851 90,60.149 90.149,60 95,60 95.27,59.73 U2.1
DIG_3: J6.08 U8.1 | length 27.3
  Top Layer w0.254: J6.08 88.095,71 89.851,71 90,70.851 90,69.149 90.149,69 90.851,69 91,68.851 91,61.149 91.149,61 102,61 102.27,60.73 U8.1
DIG_4: J6.10 U9.1 | length 21.5
  Top Layer w0.254: U9.1 81.27,57.84 81.43,58 82,58 82,61.851 82.149,62 83.851,62 84,62.149 84,72.851 84.149,73 87.555,73 J6.10
DIG_5: J6.12 U10.1 | length 14.3
  Top Layer w0.254: J6.12 88.015,76 90.851,76 91,75.851 91,71.149 91.149,71 94.851,71 95.27,70.581 U10.1
DIG_6: J6.14 U11.1 | length 18.5
  Top Layer w0.254: J6.14 88.175,78 90.851,78 91,78.149 91,83.851 91.149,84 95,84 95.27,83.73 U11.1
DIG_7: J6.16 U12.1 | length 24.3
  Top Layer w0.254: J6.16 88,81.065 88,84.851 88.149,85 101.851,85 102.27,84.581 U12.1
DIG_8: J6.15 U13.1 | length 31.9
  Top Layer w0.254: U13.1 60.27,84.851 60.419,85 81.851,85 82,84.851 82,81.065 J6.15
DIG_9: J6.13 U19.1 | length 26
  Top Layer w0.254: U19.1 67.27,78.84 67.43,79 68,79 68,84 79.851,84 80,83.851 80,78.149 80.149,78 81.825,78 J6.13
DIG_10: J6.11 U20.1 | length 17
  Top Layer w0.254: U20.1 74.27,81.851 74.419,82 78,82 78,76.149 78.149,76 81.985,76 J6.11
DIG_11: J6.09 U21.1 | length 12
  Top Layer w0.254: U21.1 75.8,68.8 76,69 76,72.851 76.149,73 81.905,73 J6.09
DIG_12: J6.07 U22.1 | length 34.9
  Top Layer w0.254: U22.1 60.27,57.84 60.43,58 61,58 61,66.851 61.149,67 76.851,67 77,67.149 77,70.851 77.149,71 81.905,71 J6.07
DIG_13: J6.05 U23.1 | length 24.8
  Top Layer w0.254: U23.1 67.27,57.84 67.43,58 68,58 68,65.851 68.149,66 77.851,66 78,66.149 78,67.851 78.149,68 81.985,68 J6.05
DIG_14: J6.03 U24.1 | length 15.8
  Top Layer w0.254: U24.1 75.651,57.8 76,58.149 76,63.851 76.149,64 78.851,64 79,64.149 79,65.851 79.149,66 81.825,66 J6.03
DIG_15: 2kR15.1 J1.2 | length 17.1
  Top Layer w0.254: 2kR15.1 46,89.851 46.149,90 53.851,90 54,90.149 54,92.9 J1.2
DIG_16: 2kR16.1 J2.2 | length 24.9
  Top Layer w0.254: 2kR16.1 53,84.851 53.149,85 56.851,85 57,85.149 57,89.851 57.149,90 68.851,90 69,90.149 69,92.9 J2.2
DIG_17: 2kR17.1 J3.2 | length 34.8
  Top Layer w0.254: J3.2 84,92.9 84,90.149 84.149,90 96.851,90 97,89.851 97,86.149 97.205,85.944 108.851,85.944 109,85.795 2kR17.1
DIG_18: 2kR18.1 J4.2 | length 27
  Top Layer w0.254: J4.2 99,92.9 99,90.149 99.149,90 110.851,90 111,89.851 111,85.149 111.149,85 116,85 2kR18.1
DIG_19: 2kR19.1 J5.2 | length 20.1
  Top Layer w0.254: J5.2 114,92.9 114,90.149 114.149,90 123.851,90 124,89.851 2kR19.1
DIG_20: 2kR20.1 J7.2 | length 10.1
  Top Layer w0.254: J7.2 113.9,42.851 114.049,43 119.851,43 120,43.149 2kR20.1
DIG_21: 2kR21.1 J8.2 | length 15.2
  Top Layer w0.254: J8.2 98.9,42.851 99.049,43 110,43 2kR21.1
DIG_22: 2kR22.1 J9.2 | length 15.1
  Top Layer w0.254: J9.2 84,40.1 84,42.851 84.149,43 95,43 2kR22.1
DIG_23: 2kR23.1 J10.2 | length 16.3
  Top Layer w0.254: 2kR23.1@57,44.369 57,43 68.851,43 69,42.851 69,40.1 J10.2
DIG_24: 2kR24.1 J11.2 | length 14.1
  Top Layer w0.254: 2kR24.1 44,43.149 44.149,43 53.851,43 54,42.851 54,40.1 J11.2
GND: 100nF1.2 100nF6.1 C2.2 C3.2 C4.2 C5.2 C7.1 C8.1 C9.1 C10.1 J1.3 J2.3 J3.3 J4.3 J5.3 J6.01 J7.3 J8.3 J9.3 J10.3 J11.3 P1.2 P2.2 P3.2 P4.2 P5.2 P6.2 P7.2 P8.2 P9.2 P10.2 P11.2 P12.2 P13.2 P14.2 P15.2 P16.2 P17.2 P18.2 P19.2 P20.2 P21.2 P22.2 P23.2 P24.2 pad.1 U1.2 U2.2 U3.2 U4.2 U5.2 U6.2 U7.2 U8.2 U9.2 U10.2 U11.2 U12.2 U13.2 U14.2 U15.2 U16.2 U17.2 U18.2 U19.2 U20.2 U21.2 U22.2 U23.2 U24.2 | length 914.2
  Top Layer w0.254: v1(35,55) 46,55 ; U3.2 43.73,78.84 43.57,79 35,79 v1(35,76) 51,76 ; v1(44,37) C10.1 ; U18.2 46.27,54.73 46,55 ; U4.2 50.73,76.27 51,76 ; U17.2 53.27,54.73 53,55 ; U22.2 57.73,55.27 58,55 ; U13.2 57.73,76.27 58,76 ; v1(60,37) C9.1 ; 100nF1.2 v1(63,96) ; U23.2 64.73,55.27 65,55 ; U19.2 64.73,76.061 64.791,76 ; U24.2 71.73,55.27 72,55 ; U20.2 71.73,76.149 71.581,76 64.791,76 ; v1(75,37) C8.1 ; C2.2 v1(78,96) ; U9.2 78.73,55.27 79,55 ; v1(79,61) 79,62.851 79.149,63 82.065,63 J6.01 ; U1.2 85.73,55.27 86,55 ; v1(90,37) C7.1 ; C3.2 v1(93,96) ; U2.2 92.73,55.27 93,55 ; U10.2 92.73,67.27 93,67 v1(135,67) ; U11.2 92.73,76.27 93,76 100,76 ; U8.2 99.73,55.27 100,55 ; U12.2 99.73,76.27 100,76 ; v1(105,37) 100nF6.1 ; C4.2 v1(108,96) ; U5.2 106.73,76.27 107,76 ; U16.2 109.27,54.73 109,55 ; U6.2 113.73,76.27 114,76 ; U15.2 116.27,54.73 116,55 ; U7.2 120.73,76.27 121,76 ; C5.2 v1(124,96) ; U14.2 123.27,54.73 123,55 116,55 ; v1(135,76) 121,76 ; 46,55 53,55 ; 51,76 58,76 ; 53,55 58,55 ; 58,55 65,55 ; 58,76 64.791,76 ; 65,55 72,55 ; 72,55 79,55 ; 79,55 86,55 ; 86,55 93,55 ; 93,55 100,55 ; 100,55 109,55 ; 100,76 107,76 ; 107,76 114,76 ; 109,55 116,55 ; 114,76 121,76
  Bottom Layer w0.254: v1(35,49) 48,49 ; v1(35,55) 39.851,55 40,55.149 40,61.851 40.149,62 47.851,62 ; v1(35,76) 35,81.851 35.149,82 47.5,82 ; P17.2 47.75,49.25 48,49 ; P7.2 48,66.36 48,62.149 47.851,62 ; P6.2 47.75,81.75 47.5,82 ; v1(48,98) 50,98 ; J1.3 50.149,93 50,93.149 50,98 ; J11.3 57.851,40 58,39.851 v1(58,35) 73,35 ; P22.2 57.75,49.187 57.563,49 ; P16.2 57.75,62.165 57.601,62.016 50.644,62.016 50.628,62 47.851,62 ; P18.2 57.851,76.711 57.851,81.851 57.702,82 ; J2.3 65.193,93 65.044,93.149 65.044,98 ; P24.2 P23.2 67.75,49.069 67.665,48.984 ; P19.2 68,76.86 68,81.851 67.851,82 ; J10.3 72.851,40 73,39.851 73,35 ; P4.2 77.75,48.984 ; P21.2 78,66.36 78,61.149 78.851,61.149 v1(79,61) ; P20.2 78,76.86 78,81.851 77.851,82 ; J3.3 80.149,93 80,93.149 80,98 ; J9.3 87.851,40 88,39.851 88,35 ; P1.2 87.75,48.984 ; P5.2 87.75,70.75 88,71 98,71 ; P11.2 87.75,81.75 87.5,82 ; J4.3 95.149,93 95,93.149 95,98 ; P2.2 97.75,51.266 97.484,51 94.149,51 94,50.851 94,49 93.984,48.984 87.75,48.984 ; P3.2 97.75,70.75 98,71 ; P12.2 97.75,82 ; J8.3 102.851,40 103,39.851 103,35 ; P15.2 107.75,49.25 108,49 118,49 ; P14.2 107.75,62.25 108,62 ; P8.2 107.75,81.75 108,82 ; J5.3 110.149,93 110,93.149 110,97.851 109.851,98 95,98 ; J7.3 117.851,40 118,39.851 118,35.149 117.851,35 103,35 ; P13.2 117.75,49.25 118,49 ; P10.2 117.75,62.25 118,62 ; P9.2 117.75,81.75 118,82 108,82 ; v1(135,49) 118,49 ; v1(135,67) 135,62.149 134.851,62 118,62 ; 47.5,82 57.702,82 ; 48,49 57.563,49 ; 50,98 65.044,98 ; 57.563,49 57.579,48.984 67.665,48.984 ; 57.702,82 67.851,82 ; 65.044,98 80,98 ; 67.665,48.984 72.302,48.984 72.328,48.958 73.17,48.958 73.196,48.984 77.75,48.984 ; 67.851,82 77.851,82 ; 73,35 88,35 ; 77.75,48.984 87.75,48.984 ; 77.851,82 87.5,82 ; 80,98 95,98 ; 87.5,82 97.75,82 ; 88,35 103,35 ; 97.75,82 108,82 ; 98,71 99.202,71 99.218,70.984 101.344,70.984 101.36,71 103.851,71 104,70.851 104,63 105,62 108,62 ; 108,62 118,62
RED_DIG_15: 2kR15.2 U3.1 | length 3.5
  Top Layer w0.254: 2kR15.2 46,79.514 46.27,79.244 U3.1
RED_DIG_16: 2kR16.2 U4.1 | length 3.5
  Top Layer w0.254: 2kR16.2 53,79.514 53.27,79.244 U4.1
RED_DIG_17: 2kR17.2 U5.1 | length 2.5
  Top Layer w0.254: 2kR17.2 109,79.514 109.27,79.244 U5.1
RED_DIG_18: 2kR18.2 U6.1 | length 2.5
  Top Layer w0.254: 2kR18.2 116,79.514 116.27,79.244 U6.1
RED_DIG_19: 2kR19.2 U7.1 | length 2.8
  Top Layer w0.254: U7.1 123.27,80.595 123.419,80.744 123.596,80.744 124,81.148 2kR19.2
RED_DIG_20: 2kR20.2 U14.1 | length 7
  Top Layer w0.254: 2kR20.2 120,52 120.57,52 120.73,52.16 U14.1
RED_DIG_21: 2kR21.2 U15.1 | length 9.9
  Top Layer w0.254: 2kR21.2 110,48.851 110.149,49 113.581,49 113.73,49.149 U15.1
RED_DIG_22: 2kR22.2 U16.1 | length 18
  Top Layer w0.254: 2kR22.2 95,48 106.581,48 106.73,48.149 U16.1
RED_DIG_23: 2kR23.2 U17.1 | length 12.4
  Top Layer w0.254: U17.1 50.73,47.205 50.879,47.056 57,47.056 2kR23.2@57,46
RED_DIG_24: 2kR24.2 U18.1 | length 6.5
  Top Layer w0.254: U18.1 43.73,46.085 2kR24.2
pads on no net: J1.4 J2.4 J3.4 J4.4 J5.4 J7.4 J8.4 J9.4 J10.4 J11.4 P1.3 P1.4 P2.3 P2.4 P3.3 P3.4 P4.3 P4.4 P5.3 P5.4 P6.3 P6.4 P7.3 P7.4 P8.3 P8.4 P9.3 P9.4 P10.3 P10.4 P11.3 P11.4 P12.3 P12.4 P13.3 P13.4 P14.3 P14.4 P15.3 P15.4 P16.3 P16.4 P17.3 P17.4 P18.3 P18.4 P19.3 P19.4 P20.3 P20.4 P21.3 P21.4 P22.3 P22.4 P23.3 P23.4 P24.3 P24.4

## Polygon pours and split planes (outlines as drawn)
GND on Top Layer "GND" (solid, pour order 0): 30,30 30,100 139,100 139,30
GND on Bottom Layer "GND" (solid, pour order 1): 30,30 30,100 139,100 139,30
+12V on +12V "+12V" (solid, pour order 2): 30,30 30,100 139,100 139,30
GND on -12V "-12V" (solid, pour order 3): 30,30 30,100 139,100 139,30

## Silkscreen, mask and mechanical layers (free items; w line width, h text height)
Bottom Overlay:
  lines w0.1: 31,60 43,60 ; 31,72 43,72 ; 31,85 43,85 ; 125,60 137,60 ; 125,72 137,72 ; 125,85 137,85 ; 31,46 31,92 43,92 43,90 43,46 31,46 ; 125,47 125,93 137,93 137,91 137,47 125,47
  text "J17" at 63.746,95.254 h1.52
  text "J18" at 78.746,95.254 h1.52
  text "J19" at 93.746,95.254 h1.52
  text "J20" at 108.746,95.254 h1.52
  text "J21" at 123.746,95.254 h1.52
  text "Left to right: /  / J20,19,  / J14,15, / J11,12, / J13,17 /  / J21,23, / J6,J16, / J10,3, / J25,18 /  / J22,24 / J5,4, / J7,2, / J1,26" at 42,49 h1.52
  text "Left to right: /  / J20,19,  / J14,15, / J11,12, / J13,17 /  / J21,23, / J6,J16, / J10,3, / J25,18 /  / J22,24 / J5,4, / J7,2, / J1,26" at 136,49 h1.52
  text "Populate Receivers Here" at 133,38 h1.52
  text "J26" at 63.746,37.254 h1.52
  text "J25" at 78.746,37.254 h1.52
  text "J24" at 93.746,37.254 h1.52
  text "J23" at 108.746,37.254 h1.52
  text "J22" at 123.746,37.254 h1.52
  text "Populate Receivers Here" at 45,36 h1.52
Mechanical 0:
  lines w0: 30,30 139,30 ; 30,30 30,100 ; 30,30 139,30 ; 30,30 30,100 ; 30,100 139,100 ; 30,100 139,100 ; 139,30 139,100 ; 139,30 139,100